# EAGLE board vybijec_panel (EAGLE 7.2.0)
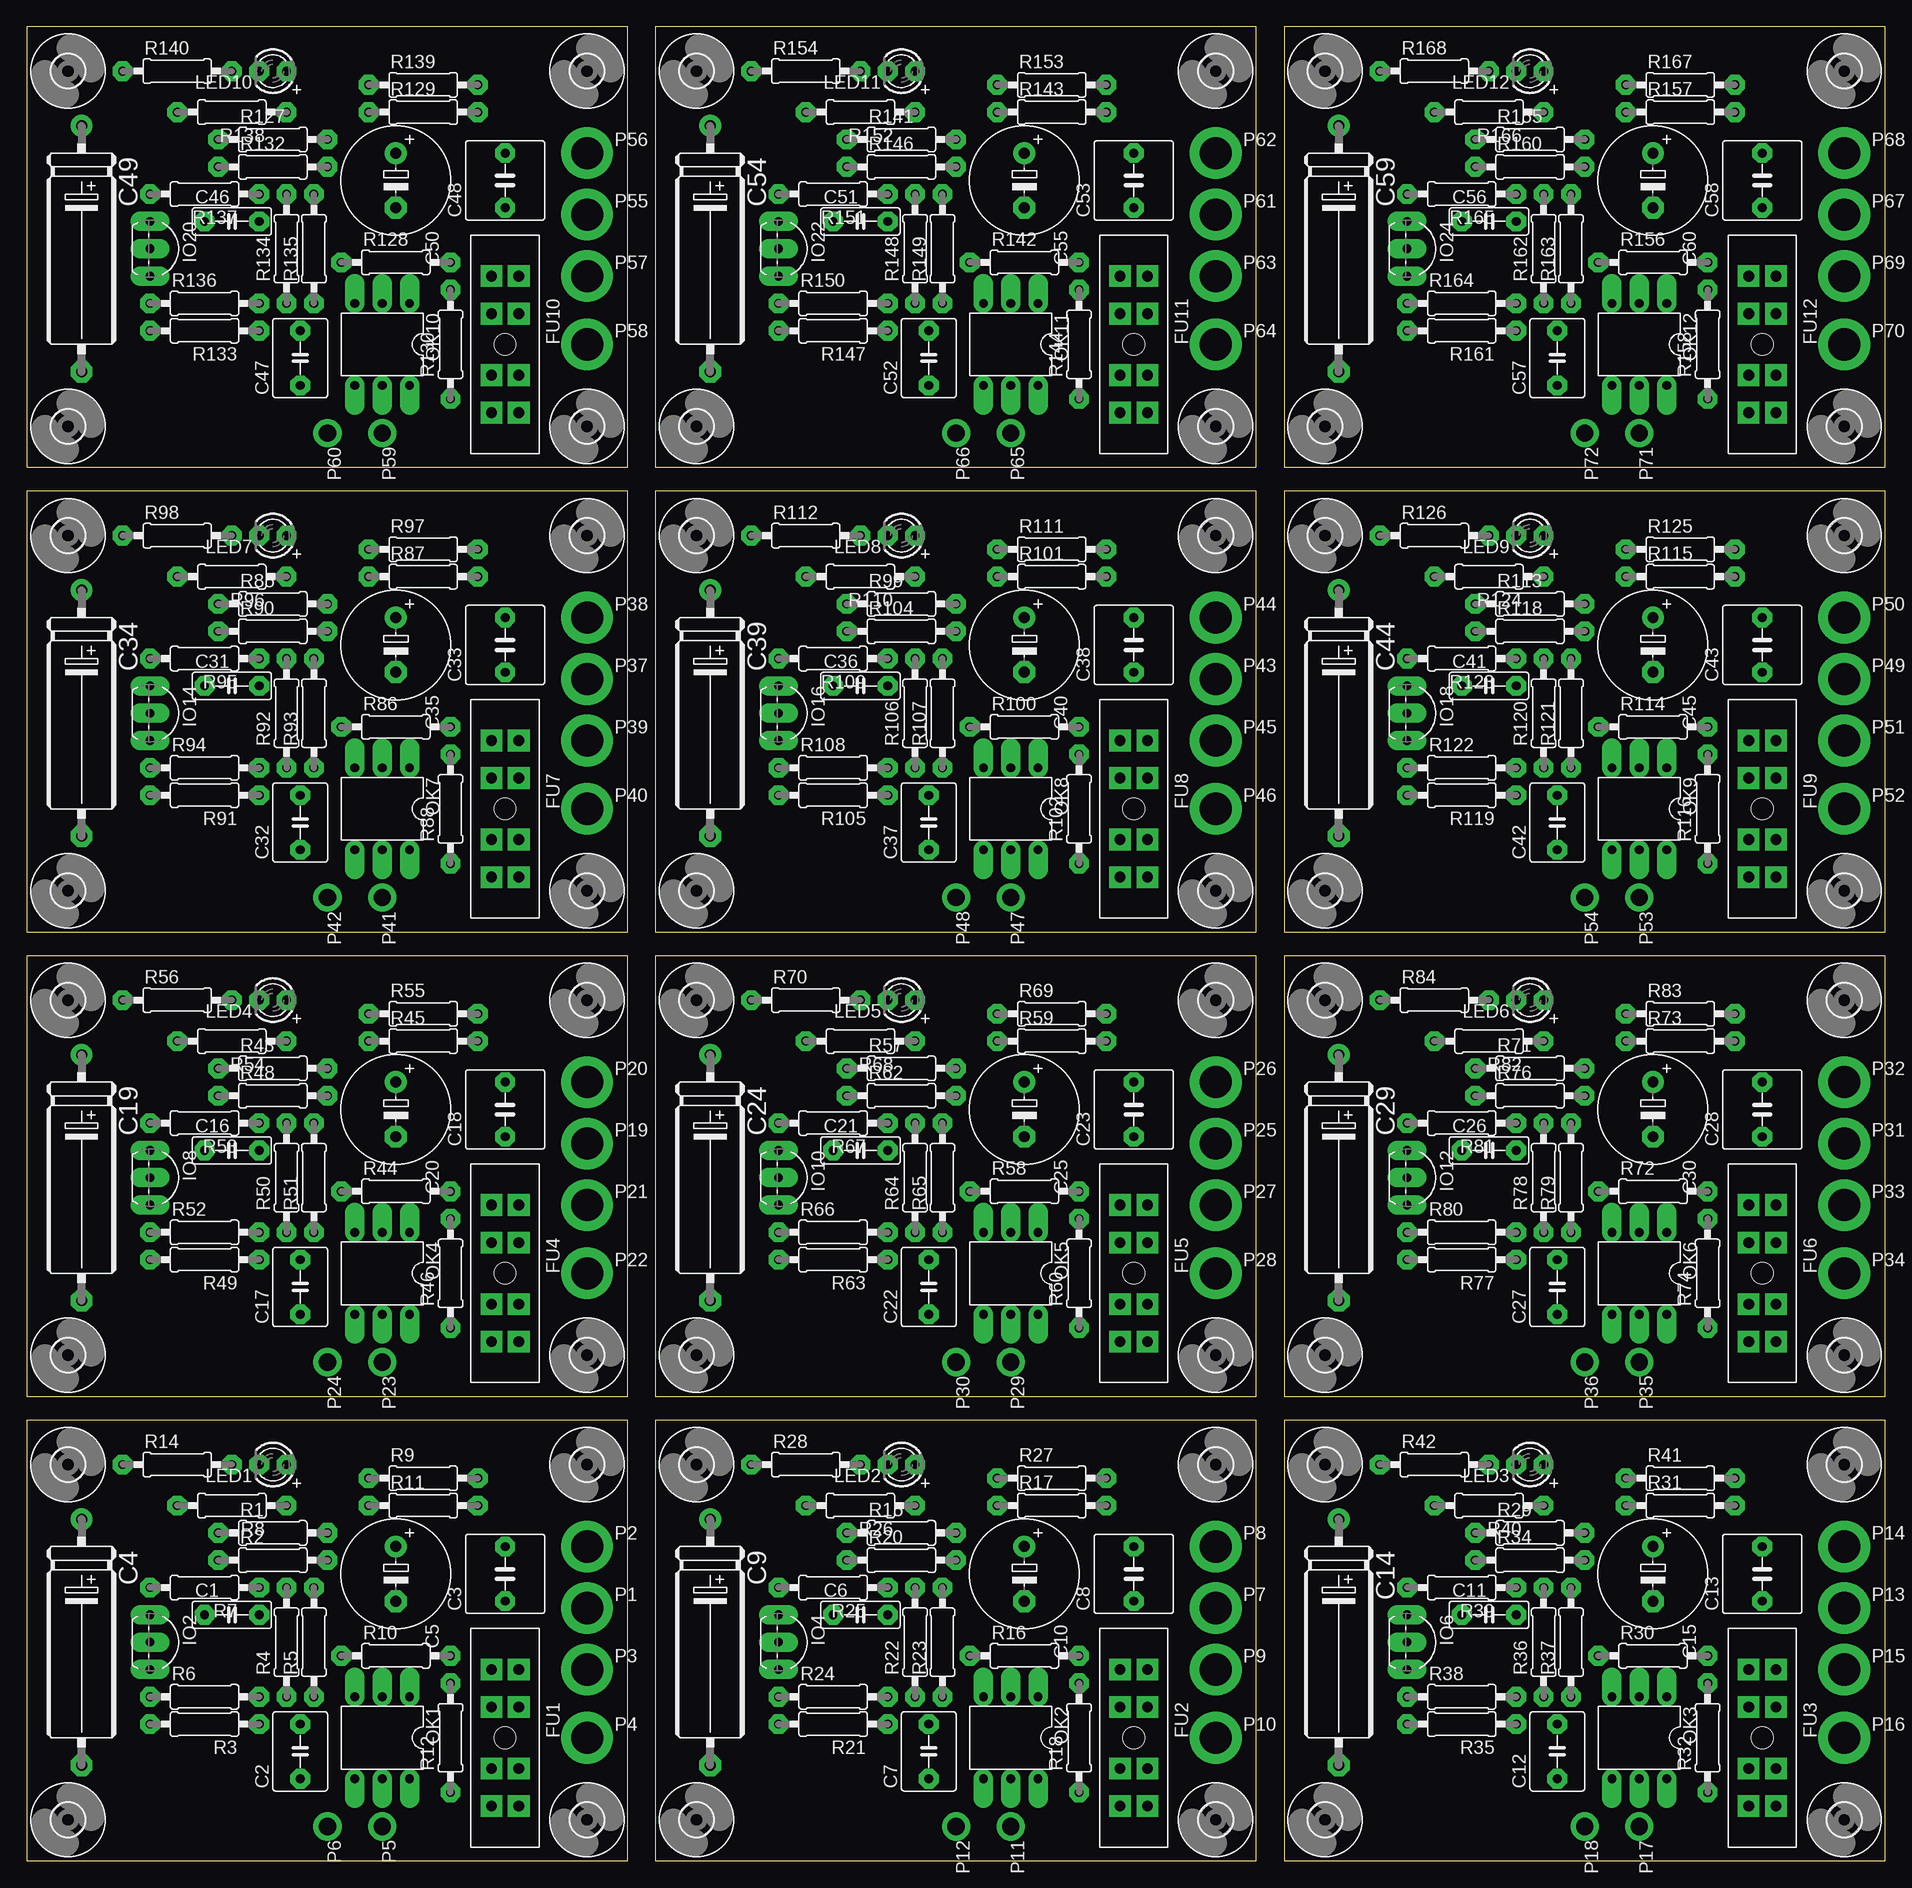
[diagram p0: board, top side]
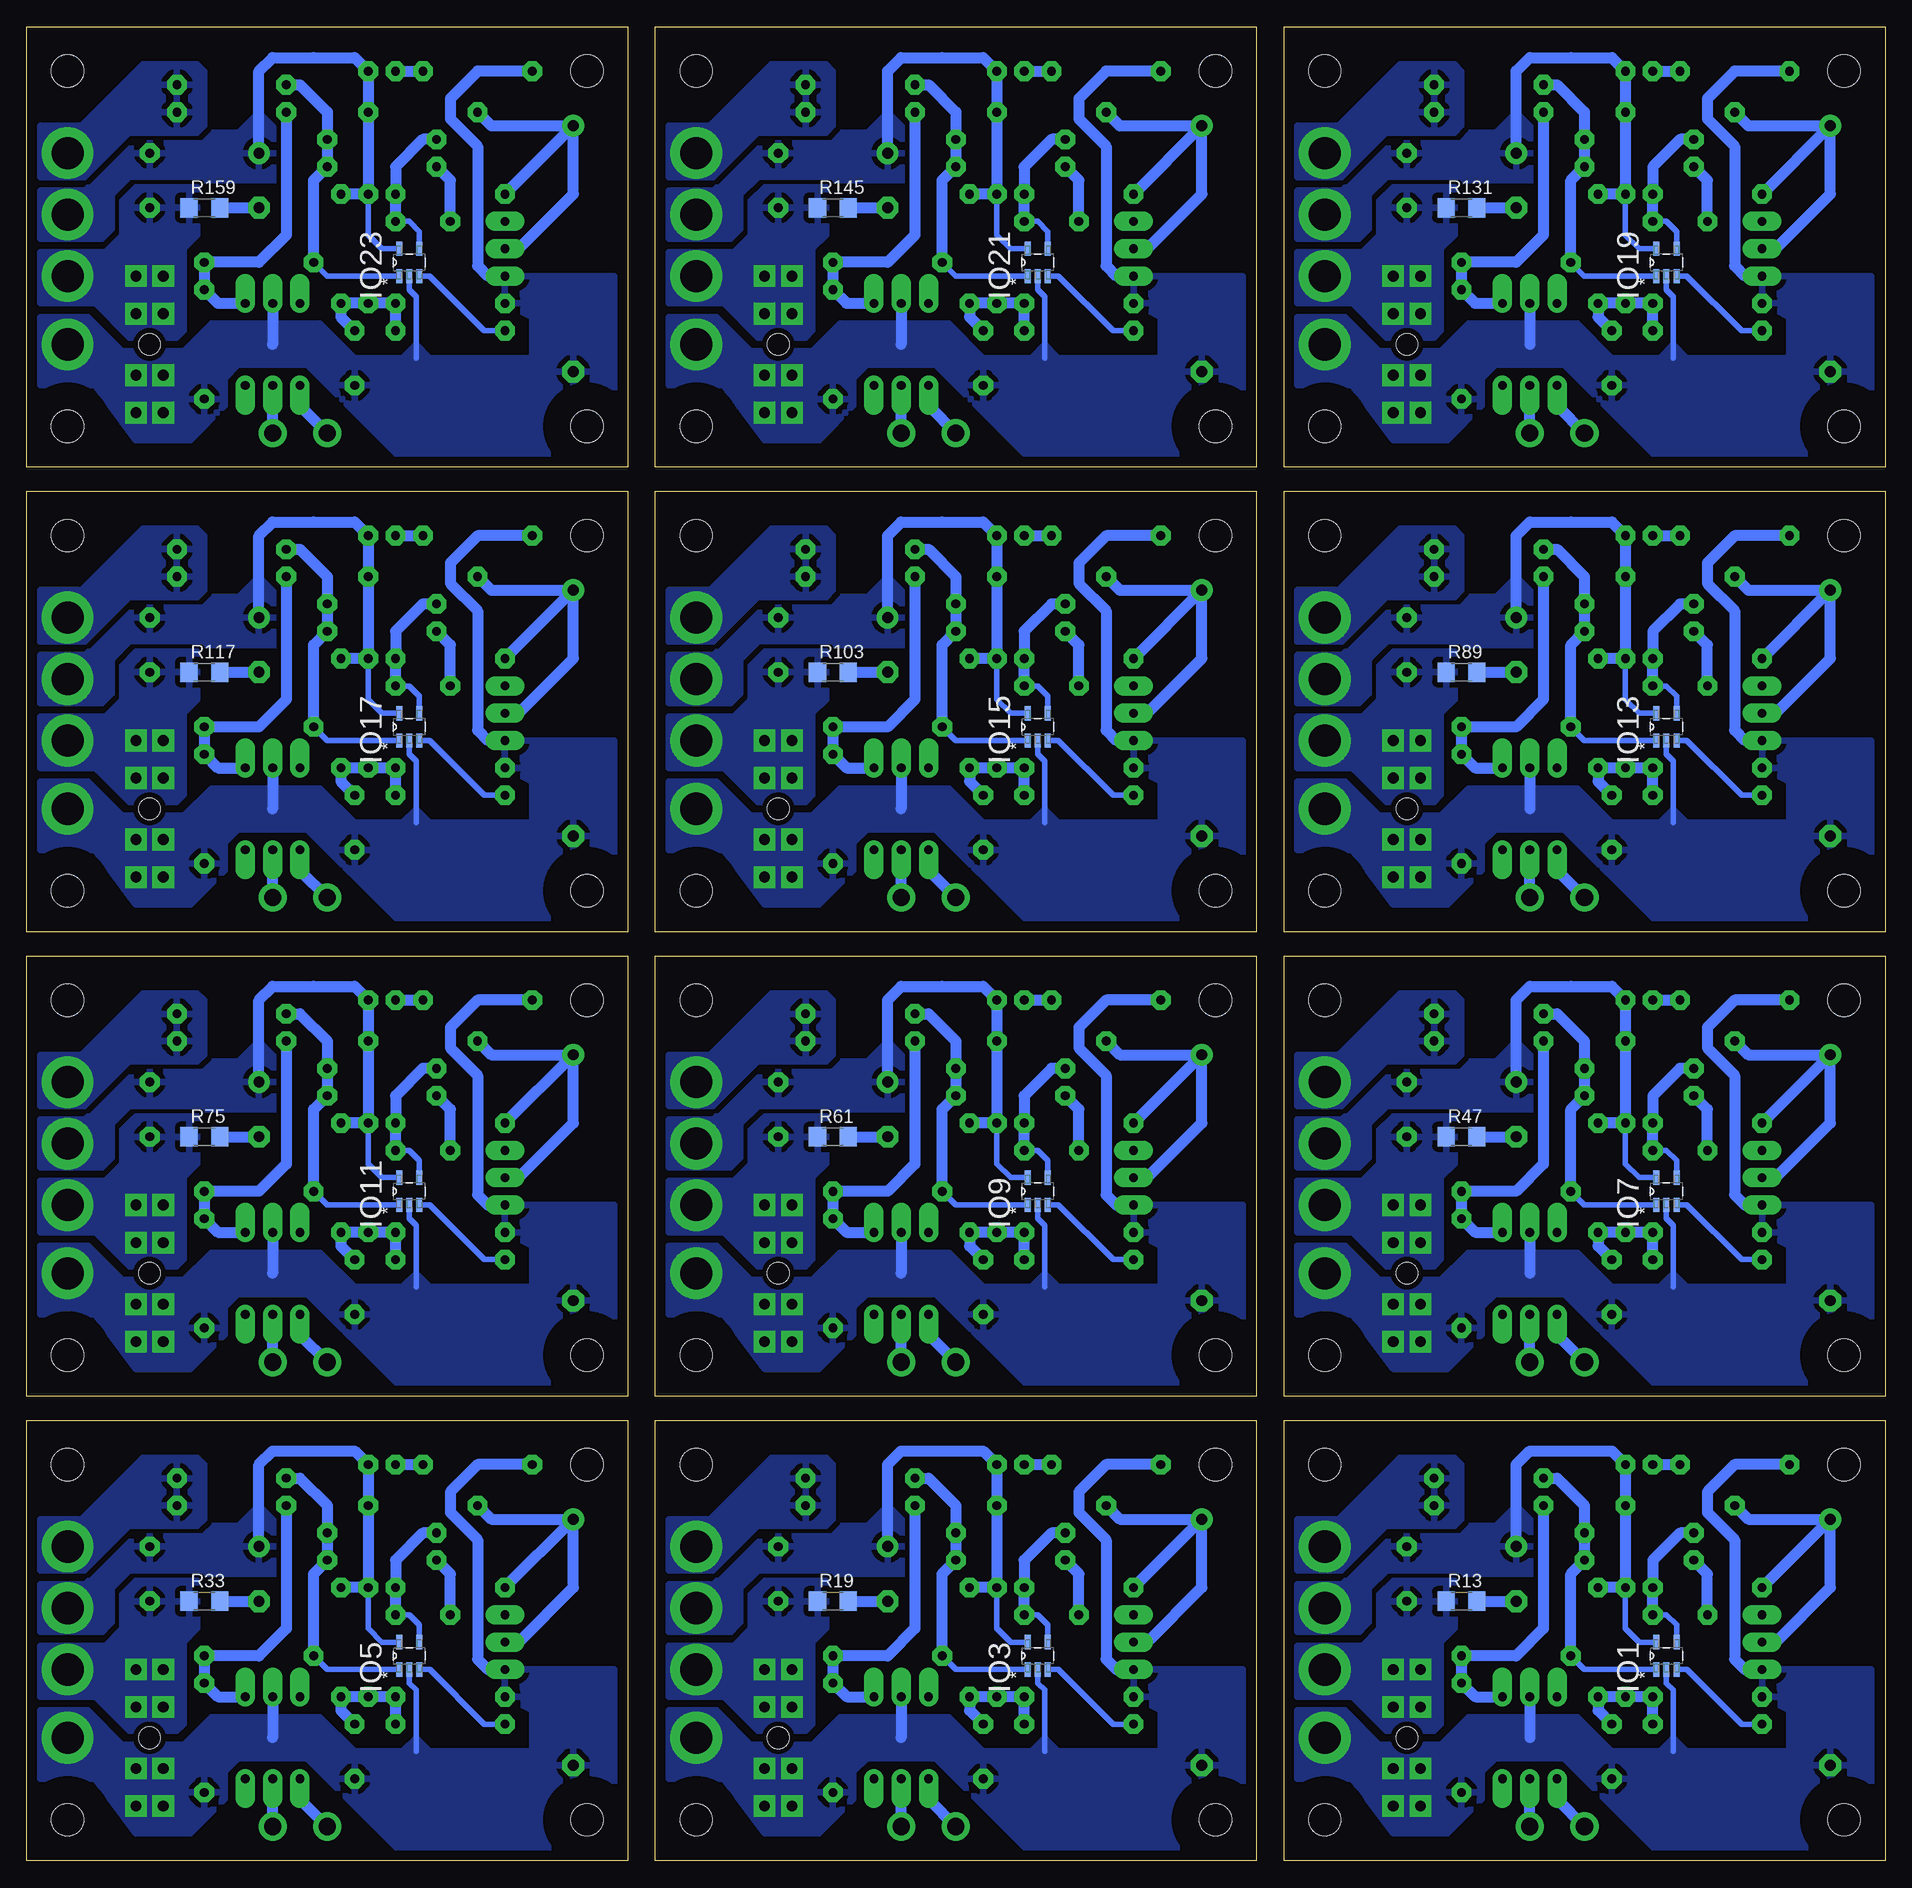
[diagram p1: board, bottom side, seen from below]

Size 172.7 x 170.49 mm. Coordinates in mm from the lower left corner, seen from the top.
Outline: 0,0 55.86,0 55.86,40.95 0,40.95 0,0
Outline: 58.42,0 114.28,0 114.28,40.95 58.42,40.95 58.42,0
Outline: 116.84,0 172.7,0 172.7,40.95 116.84,40.95 116.84,0
Outline: 0,43.18 55.86,43.18 55.86,84.12 0,84.12 0,43.18
Outline: 58.42,43.18 114.28,43.18 114.28,84.12 58.42,84.12 58.42,43.18
Outline: 116.84,43.18 172.7,43.18 172.7,84.12 116.84,84.12 116.84,43.18
Outline: 0,86.36 55.86,86.36 55.86,127.31 0,127.31 0,86.36
Outline: 58.42,86.36 114.28,86.36 114.28,127.31 58.42,127.31 58.42,86.36
Outline: 116.84,86.36 172.7,86.36 172.7,127.31 116.84,127.31 116.84,86.36
Outline: 0,129.54 55.86,129.54 55.86,170.49 0,170.49 0,129.54
Outline: 58.42,129.54 114.28,129.54 114.28,170.49 58.42,170.49 58.42,129.54
Outline: 116.84,129.54 172.7,129.54 172.7,170.49 116.84,170.49 116.84,129.54
Copper layers (1*16): Top 0.035mm / dielectric 1.5mm / Bottom 0.035mm
Design rules "designRules *": minimum track width 10mil, minimum drill 24mil, track to track 16mil, track to pad 10mil, pad to pad 8mil, via to via 8mil, smd to smd 8mil, copper to edge 20mil, drill to drill 8mil, minimum pad ring 20mil, minimum via ring 8mil, stop-mask expansion 4mil, vias tented up to drill 0mil, thermal gap 20mil

## Footprints (pad centres in the part's own frame; a part is rotated, then mirrored left to right if it is on the bottom)
C050-025X075 = drill 0.813 octagon: 1 -2.54,0; 2 2.54,0
C050-050X075 = drill 0.813 octagon: 1 -2.54,0; 2 2.54,0
C050-075X075 = drill 0.813 octagon: 1 -2.54,0; 2 2.54,0
E22-6 = drill 1.016: + -11.43,0 | drill 1.016 octagon: - 11.43,0
E5-10,5 = drill 1.016: + -2.54,0 | drill 1.016 octagon: - 2.54,0
POJ20X6 = drill 1 square: 1-1 1.27,6.35; 1-2 -1.27,6.35; 1-3 1.27,2.857; 1-4 -1.27,2.857; 2-1 1.27,-2.857; 2-2 -1.27,-2.857; 2-3 1.27,-6.35; 2-4 -1.27,-6.35 | hole 2: 0,0
SOT95P275X110-5N = smd 1.321 x 0.559: 1 -1.27,0.94; 2 -1.27,0; 3 -1.27,-0.94; 4 1.27,-0.94; 5 1.27,0.94
TO92- = drill 0.813 long: 1 2.54,0; 2 0,0; 3 -2.54,0
LED3MM = drill 0.813 pad 1.676 octagon: A -1.27,0; K 1.27,0
DIL06 = drill 0.813 offset: 1 -2.54,-3.81; 2 0,-3.81; 3 2.54,-3.81; 4 2.54,3.81; 5 0,3.81; 6 -2.54,3.81
PAD3MM = drill 3 pad 4: 1 0,0
PAD1.6MM = drill 1.6: P$1 0,0
0207/10 = drill 0.813 octagon: 1 -5.08,0; 2 5.08,0
R1206 = smd 1.6 x 1.803: 1 -1.422,0; 2 1.422,0
3,0 = hole 3: 0,0

## Placement (x,y rotation side)
C1  100k  [C050-025X075]  19.05,22.86 0 top
C2  2M2  [C050-050X075]  25.4,10.16 90 top
C3  15M  [C050-075X075]  44.45,26.67 90 top
C4  20M  [E22-6]  5.08,20.32 270 top
C5  2G2  [E5-10,5]  34.29,26.67 270 top
C6  100k  [C050-025X075]  77.47,22.86 0 top
C7  2M2  [C050-050X075]  83.82,10.16 90 top
C8  15M  [C050-075X075]  102.87,26.67 90 top
C9  20M  [E22-6]  63.5,20.32 270 top
C10  2G2  [E5-10,5]  92.71,26.67 270 top
C11  100k  [C050-025X075]  135.89,22.86 0 top
C12  2M2  [C050-050X075]  142.24,10.16 90 top
C13  15M  [C050-075X075]  161.29,26.67 90 top
C14  20M  [E22-6]  121.92,20.32 270 top
C15  2G2  [E5-10,5]  151.13,26.67 270 top
C16  100k  [C050-025X075]  19.05,66.04 0 top
C17  2M2  [C050-050X075]  25.4,53.34 90 top
C18  15M  [C050-075X075]  44.45,69.85 90 top
C19  20M  [E22-6]  5.08,63.5 270 top
C20  2G2  [E5-10,5]  34.29,69.85 270 top
C21  100k  [C050-025X075]  77.47,66.04 0 top
C22  2M2  [C050-050X075]  83.82,53.34 90 top
C23  15M  [C050-075X075]  102.87,69.85 90 top
C24  20M  [E22-6]  63.5,63.5 270 top
C25  2G2  [E5-10,5]  92.71,69.85 270 top
C26  100k  [C050-025X075]  135.89,66.04 0 top
C27  2M2  [C050-050X075]  142.24,53.34 90 top
C28  15M  [C050-075X075]  161.29,69.85 90 top
C29  20M  [E22-6]  121.92,63.5 270 top
C30  2G2  [E5-10,5]  151.13,69.85 270 top
C31  100k  [C050-025X075]  19.05,109.22 0 top
C32  2M2  [C050-050X075]  25.4,96.52 90 top
C33  15M  [C050-075X075]  44.45,113.03 90 top
C34  20M  [E22-6]  5.08,106.68 270 top
C35  2G2  [E5-10,5]  34.29,113.03 270 top
C36  100k  [C050-025X075]  77.47,109.22 0 top
C37  2M2  [C050-050X075]  83.82,96.52 90 top
C38  15M  [C050-075X075]  102.87,113.03 90 top
C39  20M  [E22-6]  63.5,106.68 270 top
C40  2G2  [E5-10,5]  92.71,113.03 270 top
C41  100k  [C050-025X075]  135.89,109.22 0 top
C42  2M2  [C050-050X075]  142.24,96.52 90 top
C43  15M  [C050-075X075]  161.29,113.03 90 top
C44  20M  [E22-6]  121.92,106.68 270 top
C45  2G2  [E5-10,5]  151.13,113.03 270 top
C46  100k  [C050-025X075]  19.05,152.4 0 top
C47  2M2  [C050-050X075]  25.4,139.7 90 top
C48  15M  [C050-075X075]  44.45,156.21 90 top
C49  20M  [E22-6]  5.08,149.86 270 top
C50  2G2  [E5-10,5]  34.29,156.21 270 top
C51  100k  [C050-025X075]  77.47,152.4 0 top
C52  2M2  [C050-050X075]  83.82,139.7 90 top
C53  15M  [C050-075X075]  102.87,156.21 90 top
C54  20M  [E22-6]  63.5,149.86 270 top
C55  2G2  [E5-10,5]  92.71,156.21 270 top
C56  100k  [C050-025X075]  135.89,152.4 0 top
C57  2M2  [C050-050X075]  142.24,139.7 90 top
C58  15M  [C050-075X075]  161.29,156.21 90 top
C59  20M  [E22-6]  121.92,149.86 270 top
C60  2G2  [E5-10,5]  151.13,156.21 270 top
FU1  20A  [POJ20X6]  44.45,11.43 0 top
FU2  20A  [POJ20X6]  102.87,11.43 0 top
FU3  20A  [POJ20X6]  161.29,11.43 0 top
FU4  20A  [POJ20X6]  44.45,54.61 0 top
FU5  20A  [POJ20X6]  102.87,54.61 0 top
FU6  20A  [POJ20X6]  161.29,54.61 0 top
FU7  20A  [POJ20X6]  44.45,97.79 0 top
FU8  20A  [POJ20X6]  102.87,97.79 0 top
FU9  20A  [POJ20X6]  161.29,97.79 0 top
FU10  20A  [POJ20X6]  44.45,140.97 0 top
FU11  20A  [POJ20X6]  102.87,140.97 0 top
FU12  20A  [POJ20X6]  161.29,140.97 0 top
IO1  NCS2001SN2T1G  [SOT95P275X110-5N]  20.32,19.05 90 bottom
IO2  LM285Z-2V5  [TO92-]  11.43,20.32 270 top
IO3  NCS2001SN2T1G  [SOT95P275X110-5N]  78.74,19.05 90 bottom
IO4  LM285Z-2V5  [TO92-]  69.85,20.32 270 top
IO5  NCS2001SN2T1G  [SOT95P275X110-5N]  137.16,19.05 90 bottom
IO6  LM285Z-2V5  [TO92-]  128.27,20.32 270 top
IO7  NCS2001SN2T1G  [SOT95P275X110-5N]  20.32,62.23 90 bottom
IO8  LM285Z-2V5  [TO92-]  11.43,63.5 270 top
IO9  NCS2001SN2T1G  [SOT95P275X110-5N]  78.74,62.23 90 bottom
IO10  LM285Z-2V5  [TO92-]  69.85,63.5 270 top
IO11  NCS2001SN2T1G  [SOT95P275X110-5N]  137.16,62.23 90 bottom
IO12  LM285Z-2V5  [TO92-]  128.27,63.5 270 top
IO13  NCS2001SN2T1G  [SOT95P275X110-5N]  20.32,105.41 90 bottom
IO14  LM285Z-2V5  [TO92-]  11.43,106.68 270 top
IO15  NCS2001SN2T1G  [SOT95P275X110-5N]  78.74,105.41 90 bottom
IO16  LM285Z-2V5  [TO92-]  69.85,106.68 270 top
IO17  NCS2001SN2T1G  [SOT95P275X110-5N]  137.16,105.41 90 bottom
IO18  LM285Z-2V5  [TO92-]  128.27,106.68 270 top
IO19  NCS2001SN2T1G  [SOT95P275X110-5N]  20.32,148.59 90 bottom
IO20  LM285Z-2V5  [TO92-]  11.43,149.86 270 top
IO21  NCS2001SN2T1G  [SOT95P275X110-5N]  78.74,148.59 90 bottom
IO22  LM285Z-2V5  [TO92-]  69.85,149.86 270 top
IO23  NCS2001SN2T1G  [SOT95P275X110-5N]  137.16,148.59 90 bottom
IO24  LM285Z-2V5  [TO92-]  128.27,149.86 270 top
LED1  [LED3MM]  22.86,36.83 180 top
LED2  [LED3MM]  81.28,36.83 180 top
LED3  [LED3MM]  139.7,36.83 180 top
LED4  [LED3MM]  22.86,80.01 180 top
LED5  [LED3MM]  81.28,80.01 180 top
LED6  [LED3MM]  139.7,80.01 180 top
LED7  [LED3MM]  22.86,123.19 180 top
LED8  [LED3MM]  81.28,123.19 180 top
LED9  [LED3MM]  139.7,123.19 180 top
LED10  [LED3MM]  22.86,166.37 180 top
LED11  [LED3MM]  81.28,166.37 180 top
LED12  [LED3MM]  139.7,166.37 180 top
OK1  4N35  [DIL06]  33.02,11.43 180 top
OK2  4N35  [DIL06]  91.44,11.43 180 top
OK3  4N35  [DIL06]  149.86,11.43 180 top
OK4  4N35  [DIL06]  33.02,54.61 180 top
OK5  4N35  [DIL06]  91.44,54.61 180 top
OK6  4N35  [DIL06]  149.86,54.61 180 top
OK7  4N35  [DIL06]  33.02,97.79 180 top
OK8  4N35  [DIL06]  91.44,97.79 180 top
OK9  4N35  [DIL06]  149.86,97.79 180 top
OK10  4N35  [DIL06]  33.02,140.97 180 top
OK11  4N35  [DIL06]  91.44,140.97 180 top
OK12  4N35  [DIL06]  149.86,140.97 180 top
P1  COLLECTOR  [PAD3MM]  52.07,23.5 0 top
P2  BASE  [PAD3MM]  52.07,29.21 0 top
P3  EMITTER  [PAD3MM]  52.07,17.78 0 top
P4  GROUND  [PAD3MM]  52.07,11.43 0 top
P5  COL  [PAD1.6MM]  33.02,3.17 270 top
P6  EMIT  [PAD1.6MM]  27.94,3.17 270 top
P7  COLLECTOR  [PAD3MM]  110.49,23.5 0 top
P8  BASE  [PAD3MM]  110.49,29.21 0 top
P9  EMITTER  [PAD3MM]  110.49,17.78 0 top
P10  GROUND  [PAD3MM]  110.49,11.43 0 top
P11  COL  [PAD1.6MM]  91.44,3.17 270 top
P12  EMIT  [PAD1.6MM]  86.36,3.17 270 top
P13  COLLECTOR  [PAD3MM]  168.91,23.5 0 top
P14  BASE  [PAD3MM]  168.91,29.21 0 top
P15  EMITTER  [PAD3MM]  168.91,17.78 0 top
P16  GROUND  [PAD3MM]  168.91,11.43 0 top
P17  COL  [PAD1.6MM]  149.86,3.17 270 top
P18  EMIT  [PAD1.6MM]  144.78,3.17 270 top
P19  COLLECTOR  [PAD3MM]  52.07,66.67 0 top
P20  BASE  [PAD3MM]  52.07,72.39 0 top
P21  EMITTER  [PAD3MM]  52.07,60.96 0 top
P22  GROUND  [PAD3MM]  52.07,54.61 0 top
P23  COL  [PAD1.6MM]  33.02,46.35 270 top
P24  EMIT  [PAD1.6MM]  27.94,46.35 270 top
P25  COLLECTOR  [PAD3MM]  110.49,66.67 0 top
P26  BASE  [PAD3MM]  110.49,72.39 0 top
P27  EMITTER  [PAD3MM]  110.49,60.96 0 top
P28  GROUND  [PAD3MM]  110.49,54.61 0 top
P29  COL  [PAD1.6MM]  91.44,46.35 270 top
P30  EMIT  [PAD1.6MM]  86.36,46.35 270 top
P31  COLLECTOR  [PAD3MM]  168.91,66.67 0 top
P32  BASE  [PAD3MM]  168.91,72.39 0 top
P33  EMITTER  [PAD3MM]  168.91,60.96 0 top
P34  GROUND  [PAD3MM]  168.91,54.61 0 top
P35  COL  [PAD1.6MM]  149.86,46.35 270 top
P36  EMIT  [PAD1.6MM]  144.78,46.35 270 top
P37  COLLECTOR  [PAD3MM]  52.07,109.86 0 top
P38  BASE  [PAD3MM]  52.07,115.57 0 top
P39  EMITTER  [PAD3MM]  52.07,104.14 0 top
P40  GROUND  [PAD3MM]  52.07,97.79 0 top
P41  COL  [PAD1.6MM]  33.02,89.53 270 top
P42  EMIT  [PAD1.6MM]  27.94,89.53 270 top
P43  COLLECTOR  [PAD3MM]  110.49,109.86 0 top
P44  BASE  [PAD3MM]  110.49,115.57 0 top
P45  EMITTER  [PAD3MM]  110.49,104.14 0 top
P46  GROUND  [PAD3MM]  110.49,97.79 0 top
P47  COL  [PAD1.6MM]  91.44,89.53 270 top
P48  EMIT  [PAD1.6MM]  86.36,89.53 270 top
P49  COLLECTOR  [PAD3MM]  168.91,109.86 0 top
P50  BASE  [PAD3MM]  168.91,115.57 0 top
P51  EMITTER  [PAD3MM]  168.91,104.14 0 top
P52  GROUND  [PAD3MM]  168.91,97.79 0 top
P53  COL  [PAD1.6MM]  149.86,89.53 270 top
P54  EMIT  [PAD1.6MM]  144.78,89.53 270 top
P55  COLLECTOR  [PAD3MM]  52.07,153.03 0 top
P56  BASE  [PAD3MM]  52.07,158.75 0 top
P57  EMITTER  [PAD3MM]  52.07,147.32 0 top
P58  GROUND  [PAD3MM]  52.07,140.97 0 top
P59  COL  [PAD1.6MM]  33.02,132.72 270 top
P60  EMIT  [PAD1.6MM]  27.94,132.72 270 top
P61  COLLECTOR  [PAD3MM]  110.49,153.03 0 top
P62  BASE  [PAD3MM]  110.49,158.75 0 top
P63  EMITTER  [PAD3MM]  110.49,147.32 0 top
P64  GROUND  [PAD3MM]  110.49,140.97 0 top
P65  COL  [PAD1.6MM]  91.44,132.72 270 top
P66  EMIT  [PAD1.6MM]  86.36,132.72 270 top
P67  COLLECTOR  [PAD3MM]  168.91,153.03 0 top
P68  BASE  [PAD3MM]  168.91,158.75 0 top
P69  EMITTER  [PAD3MM]  168.91,147.32 0 top
P70  GROUND  [PAD3MM]  168.91,140.97 0 top
P71  COL  [PAD1.6MM]  149.86,132.72 270 top
P72  EMIT  [PAD1.6MM]  144.78,132.72 270 top
R1  M33  [0207/10]  22.86,30.48 0 top
R2  15k  [0207/10]  22.86,27.94 0 top
R3  1k2  [0207/10]  16.51,12.7 180 top
R4  3M3  [0207/10]  24.13,20.32 90 top
R5  3k3  [0207/10]  26.67,20.32 90 top
R6  5k6  [0207/10]  16.51,15.24 0 top
R7  3k3  [0207/10]  16.51,25.4 180 top
R8  12k  [0207/10]  19.05,33.02 180 top
R9  120R  [0207/10]  36.83,35.56 0 top
R10  15k  [0207/10]  34.29,19.05 0 top
R11  2k2  [0207/10]  36.83,33.02 0 top
R12  5k6  [0207/10]  39.37,11.43 90 top
R13  1R0  [R1206]  39.37,24.13 0 bottom
R14  330R  [0207/10]  13.97,36.83 0 top
R15  M33  [0207/10]  81.28,30.48 0 top
R16  15k  [0207/10]  92.71,19.05 0 top
R17  2k2  [0207/10]  95.25,33.02 0 top
R18  5k6  [0207/10]  97.79,11.43 90 top
R19  1R0  [R1206]  97.79,24.13 0 bottom
R20  15k  [0207/10]  81.28,27.94 0 top
R21  1k2  [0207/10]  74.93,12.7 180 top
R22  3M3  [0207/10]  82.55,20.32 90 top
R23  3k3  [0207/10]  85.09,20.32 90 top
R24  5k6  [0207/10]  74.93,15.24 0 top
R25  3k3  [0207/10]  74.93,25.4 180 top
R26  12k  [0207/10]  77.47,33.02 180 top
R27  120R  [0207/10]  95.25,35.56 0 top
R28  330R  [0207/10]  72.39,36.83 0 top
R29  M33  [0207/10]  139.7,30.48 0 top
R30  15k  [0207/10]  151.13,19.05 0 top
R31  2k2  [0207/10]  153.67,33.02 0 top
R32  5k6  [0207/10]  156.21,11.43 90 top
R33  1R0  [R1206]  156.21,24.13 0 bottom
R34  15k  [0207/10]  139.7,27.94 0 top
R35  1k2  [0207/10]  133.35,12.7 180 top
R36  3M3  [0207/10]  140.97,20.32 90 top
R37  3k3  [0207/10]  143.51,20.32 90 top
R38  5k6  [0207/10]  133.35,15.24 0 top
R39  3k3  [0207/10]  133.35,25.4 180 top
R40  12k  [0207/10]  135.89,33.02 180 top
R41  120R  [0207/10]  153.67,35.56 0 top
R42  330R  [0207/10]  130.81,36.83 0 top
R43  M33  [0207/10]  22.86,73.66 0 top
R44  15k  [0207/10]  34.29,62.23 0 top
R45  2k2  [0207/10]  36.83,76.2 0 top
R46  5k6  [0207/10]  39.37,54.61 90 top
R47  1R0  [R1206]  39.37,67.31 0 bottom
R48  15k  [0207/10]  22.86,71.12 0 top
R49  1k2  [0207/10]  16.51,55.88 180 top
R50  3M3  [0207/10]  24.13,63.5 90 top
R51  3k3  [0207/10]  26.67,63.5 90 top
R52  5k6  [0207/10]  16.51,58.42 0 top
R53  3k3  [0207/10]  16.51,68.58 180 top
R54  12k  [0207/10]  19.05,76.2 180 top
R55  120R  [0207/10]  36.83,78.74 0 top
R56  330R  [0207/10]  13.97,80.01 0 top
R57  M33  [0207/10]  81.28,73.66 0 top
R58  15k  [0207/10]  92.71,62.23 0 top
R59  2k2  [0207/10]  95.25,76.2 0 top
R60  5k6  [0207/10]  97.79,54.61 90 top
R61  1R0  [R1206]  97.79,67.31 0 bottom
R62  15k  [0207/10]  81.28,71.12 0 top
R63  1k2  [0207/10]  74.93,55.88 180 top
R64  3M3  [0207/10]  82.55,63.5 90 top
R65  3k3  [0207/10]  85.09,63.5 90 top
R66  5k6  [0207/10]  74.93,58.42 0 top
R67  3k3  [0207/10]  74.93,68.58 180 top
R68  12k  [0207/10]  77.47,76.2 180 top
R69  120R  [0207/10]  95.25,78.74 0 top
R70  330R  [0207/10]  72.39,80.01 0 top
R71  M33  [0207/10]  139.7,73.66 0 top
R72  15k  [0207/10]  151.13,62.23 0 top
R73  2k2  [0207/10]  153.67,76.2 0 top
R74  5k6  [0207/10]  156.21,54.61 90 top
R75  1R0  [R1206]  156.21,67.31 0 bottom
R76  15k  [0207/10]  139.7,71.12 0 top
R77  1k2  [0207/10]  133.35,55.88 180 top
R78  3M3  [0207/10]  140.97,63.5 90 top
R79  3k3  [0207/10]  143.51,63.5 90 top
R80  5k6  [0207/10]  133.35,58.42 0 top
R81  3k3  [0207/10]  133.35,68.58 180 top
R82  12k  [0207/10]  135.89,76.2 180 top
R83  120R  [0207/10]  153.67,78.74 0 top
R84  330R  [0207/10]  130.81,80.01 0 top
R85  M33  [0207/10]  22.86,116.84 0 top
R86  15k  [0207/10]  34.29,105.41 0 top
R87  2k2  [0207/10]  36.83,119.38 0 top
R88  5k6  [0207/10]  39.37,97.79 90 top
R89  1R0  [R1206]  39.37,110.49 0 bottom
R90  15k  [0207/10]  22.86,114.3 0 top
R91  1k2  [0207/10]  16.51,99.06 180 top
R92  3M3  [0207/10]  24.13,106.68 90 top
R93  3k3  [0207/10]  26.67,106.68 90 top
R94  5k6  [0207/10]  16.51,101.6 0 top
R95  3k3  [0207/10]  16.51,111.76 180 top
R96  12k  [0207/10]  19.05,119.38 180 top
R97  120R  [0207/10]  36.83,121.92 0 top
R98  330R  [0207/10]  13.97,123.19 0 top
R99  M33  [0207/10]  81.28,116.84 0 top
R100  15k  [0207/10]  92.71,105.41 0 top
R101  2k2  [0207/10]  95.25,119.38 0 top
R102  5k6  [0207/10]  97.79,97.79 90 top
R103  1R0  [R1206]  97.79,110.49 0 bottom
R104  15k  [0207/10]  81.28,114.3 0 top
R105  1k2  [0207/10]  74.93,99.06 180 top
R106  3M3  [0207/10]  82.55,106.68 90 top
R107  3k3  [0207/10]  85.09,106.68 90 top
R108  5k6  [0207/10]  74.93,101.6 0 top
R109  3k3  [0207/10]  74.93,111.76 180 top
R110  12k  [0207/10]  77.47,119.38 180 top
R111  120R  [0207/10]  95.25,121.92 0 top
R112  330R  [0207/10]  72.39,123.19 0 top
R113  M33  [0207/10]  139.7,116.84 0 top
R114  15k  [0207/10]  151.13,105.41 0 top
R115  2k2  [0207/10]  153.67,119.38 0 top
R116  5k6  [0207/10]  156.21,97.79 90 top
R117  1R0  [R1206]  156.21,110.49 0 bottom
R118  15k  [0207/10]  139.7,114.3 0 top
R119  1k2  [0207/10]  133.35,99.06 180 top
R120  3M3  [0207/10]  140.97,106.68 90 top
R121  3k3  [0207/10]  143.51,106.68 90 top
R122  5k6  [0207/10]  133.35,101.6 0 top
R123  3k3  [0207/10]  133.35,111.76 180 top
R124  12k  [0207/10]  135.89,119.38 180 top
R125  120R  [0207/10]  153.67,121.92 0 top
R126  330R  [0207/10]  130.81,123.19 0 top
R127  M33  [0207/10]  22.86,160.02 0 top
R128  15k  [0207/10]  34.29,148.59 0 top
R129  2k2  [0207/10]  36.83,162.56 0 top
R130  5k6  [0207/10]  39.37,140.97 90 top
R131  1R0  [R1206]  39.37,153.67 0 bottom
R132  15k  [0207/10]  22.86,157.48 0 top
R133  1k2  [0207/10]  16.51,142.24 180 top
R134  3M3  [0207/10]  24.13,149.86 90 top
R135  3k3  [0207/10]  26.67,149.86 90 top
R136  5k6  [0207/10]  16.51,144.78 0 top
R137  3k3  [0207/10]  16.51,154.94 180 top
R138  12k  [0207/10]  19.05,162.56 180 top
R139  120R  [0207/10]  36.83,165.1 0 top
R140  330R  [0207/10]  13.97,166.37 0 top
R141  M33  [0207/10]  81.28,160.02 0 top
R142  15k  [0207/10]  92.71,148.59 0 top
R143  2k2  [0207/10]  95.25,162.56 0 top
R144  5k6  [0207/10]  97.79,140.97 90 top
R145  1R0  [R1206]  97.79,153.67 0 bottom
R146  15k  [0207/10]  81.28,157.48 0 top
R147  1k2  [0207/10]  74.93,142.24 180 top
R148  3M3  [0207/10]  82.55,149.86 90 top
R149  3k3  [0207/10]  85.09,149.86 90 top
R150  5k6  [0207/10]  74.93,144.78 0 top
R151  3k3  [0207/10]  74.93,154.94 180 top
R152  12k  [0207/10]  77.47,162.56 180 top
R153  120R  [0207/10]  95.25,165.1 0 top
R154  330R  [0207/10]  72.39,166.37 0 top
R155  M33  [0207/10]  139.7,160.02 0 top
R156  15k  [0207/10]  151.13,148.59 0 top
R157  2k2  [0207/10]  153.67,162.56 0 top
R158  5k6  [0207/10]  156.21,140.97 90 top
R159  1R0  [R1206]  156.21,153.67 0 bottom
R160  15k  [0207/10]  139.7,157.48 0 top
R161  1k2  [0207/10]  133.35,142.24 180 top
R162  3M3  [0207/10]  140.97,149.86 90 top
R163  3k3  [0207/10]  143.51,149.86 90 top
R164  5k6  [0207/10]  133.35,144.78 0 top
R165  3k3  [0207/10]  133.35,154.94 180 top
R166  12k  [0207/10]  135.89,162.56 180 top
R167  120R  [0207/10]  153.67,165.1 0 top
R168  330R  [0207/10]  130.81,166.37 0 top
U$1  [3,0]  3.81,3.81 0 top
U$2  [3,0]  3.81,36.83 0 top
U$3  [3,0]  52.07,3.81 0 top
U$4  [3,0]  52.07,36.83 0 top
U$5  [3,0]  62.23,3.81 0 top
U$6  [3,0]  62.23,36.83 0 top
U$7  [3,0]  110.49,3.81 0 top
U$8  [3,0]  110.49,36.83 0 top
U$9  [3,0]  120.65,3.81 0 top
U$10  [3,0]  120.65,36.83 0 top
U$11  [3,0]  168.91,3.81 0 top
U$12  [3,0]  168.91,36.83 0 top
U$13  [3,0]  3.81,46.99 0 top
U$14  [3,0]  3.81,80.01 0 top
U$15  [3,0]  52.07,46.99 0 top
U$16  [3,0]  52.07,80.01 0 top
U$17  [3,0]  62.23,46.99 0 top
U$18  [3,0]  62.23,80.01 0 top
U$19  [3,0]  110.49,46.99 0 top
U$20  [3,0]  110.49,80.01 0 top
U$21  [3,0]  120.65,46.99 0 top
U$22  [3,0]  120.65,80.01 0 top
U$23  [3,0]  168.91,46.99 0 top
U$24  [3,0]  168.91,80.01 0 top
U$25  [3,0]  3.81,90.17 0 top
U$26  [3,0]  3.81,123.19 0 top
U$27  [3,0]  52.07,90.17 0 top
U$28  [3,0]  52.07,123.19 0 top
U$29  [3,0]  62.23,90.17 0 top
U$30  [3,0]  62.23,123.19 0 top
U$31  [3,0]  110.49,90.17 0 top
U$32  [3,0]  110.49,123.19 0 top
U$33  [3,0]  120.65,90.17 0 top
U$34  [3,0]  120.65,123.19 0 top
U$35  [3,0]  168.91,90.17 0 top
U$36  [3,0]  168.91,123.19 0 top
U$37  [3,0]  3.81,133.35 0 top
U$38  [3,0]  3.81,166.37 0 top
U$39  [3,0]  52.07,133.35 0 top
U$40  [3,0]  52.07,166.37 0 top
U$41  [3,0]  62.23,133.35 0 top
U$42  [3,0]  62.23,166.37 0 top
U$43  [3,0]  110.49,133.35 0 top
U$44  [3,0]  110.49,166.37 0 top
U$45  [3,0]  120.65,133.35 0 top
U$46  [3,0]  120.65,166.37 0 top
U$47  [3,0]  168.91,133.35 0 top
U$48  [3,0]  168.91,166.37 0 top

## Library data of the parts
C1-C60 R1-R168 = rcl
FU1-FU12 = pojistka
IO1 IO3 IO5 IO7 IO9 IO11 IO13 IO15 IO17 IO19 IO21 IO23 = NCS2001
IO2 IO4 IO6 IO8 IO10 IO12 IO14 IO16 IO18 IO20 IO22 IO24 = LM285
LED1-LED12 = adafruit
OK1-OK12 = optocoupler; MF: FAIRCHILD SEMICONDUCTOR; MPN: 4N35; OC_FARNELL: 1328375; OC_NEWARK: 72K9946
P1-P4 P7-P10 P13-P16 P19-P22 P25-P28 P31-P34 P37-P40 P43-P46 P49-P52 P55-P58 P61-P64 P67-P70 = PADs; DIAMETER: 3mm
P5 P6 P11 P12 P17 P18 P23 P24 P29 P30 P35 P36 P41 P42 P47 P48 P53 P54 P59 P60 P65 P66 P71 P72 = PADs
U$1-U$48 = holes

## Nets
GND: C2.1 C4.- FU1.2-1 FU1.2-2 FU1.2-3 FU1.2-4 IO1.2 IO2.1 OK1.2 P4.1 R6.1 R12.1 R14.1
GND1: C7.1 C9.- FU2.2-1 FU2.2-2 FU2.2-3 FU2.2-4 IO3.2 IO4.1 OK2.2 P10.1 R18.1 R24.1 R28.1
GND2: C12.1 C14.- FU3.2-1 FU3.2-2 FU3.2-3 FU3.2-4 IO5.2 IO6.1 OK3.2 P16.1 R32.1 R38.1 R42.1
GND3: C17.1 C19.- FU4.2-1 FU4.2-2 FU4.2-3 FU4.2-4 IO7.2 IO8.1 OK4.2 P22.1 R46.1 R52.1 R56.1
GND4: C22.1 C24.- FU5.2-1 FU5.2-2 FU5.2-3 FU5.2-4 IO9.2 IO10.1 OK5.2 P28.1 R60.1 R66.1 R70.1
GND5: C27.1 C29.- FU6.2-1 FU6.2-2 FU6.2-3 FU6.2-4 IO11.2 IO12.1 OK6.2 P34.1 R74.1 R80.1 R84.1
GND6: C32.1 C34.- FU7.2-1 FU7.2-2 FU7.2-3 FU7.2-4 IO13.2 IO14.1 OK7.2 P40.1 R88.1 R94.1 R98.1
GND7: C37.1 C39.- FU8.2-1 FU8.2-2 FU8.2-3 FU8.2-4 IO15.2 IO16.1 OK8.2 P46.1 R102.1 R108.1 R112.1
GND8: C42.1 C44.- FU9.2-1 FU9.2-2 FU9.2-3 FU9.2-4 IO17.2 IO18.1 OK9.2 P52.1 R116.1 R122.1 R126.1
GND9: C47.1 C49.- FU10.2-1 FU10.2-2 FU10.2-3 FU10.2-4 IO19.2 IO20.1 OK10.2 P58.1 R130.1 R136.1 R140.1
GND10: C52.1 C54.- FU11.2-1 FU11.2-2 FU11.2-3 FU11.2-4 IO21.2 IO22.1 OK11.2 P64.1 R144.1 R150.1 R154.1
GND11: C57.1 C59.- FU12.2-1 FU12.2-2 FU12.2-3 FU12.2-4 IO23.2 IO24.1 OK12.2 P70.1 R158.1 R164.1 R168.1
N$1: C1.1 R2.1
N$2: IO1.1 R1.2 R2.2 R9.1 R10.1
N$3: C4.+ IO2.2 R7.2 R8.2
N$4: C1.2 IO1.4 R1.1 R7.1
N$5: IO1.3 R3.2
N$6: C2.2 R3.1 R4.1 R5.1 R6.2
N$7: C3.1 FU1.1-1 FU1.1-2 FU1.1-3 FU1.1-4 P3.1 R13.1
N$8: OK1.1 R10.2 R11.1 R12.2
N$9: P2.1 R9.2 R11.2
N$10: OK1.5 P5.P$1
N$11: OK1.4 P6.P$1
N$12: LED1.K R14.2
N$13: IO3.1 R15.2 R16.1 R20.2 R27.1
N$14: C5.- R13.2
N$15: C6.2 IO3.4 R15.1 R25.1
N$16: IO3.3 R21.2
N$17: C7.2 R21.1 R22.1 R23.1 R24.2
N$18: C9.+ IO4.2 R25.2 R26.2
N$19: OK2.1 R16.2 R17.1 R18.2
N$20: P8.1 R17.2 R27.2
N$21: OK2.5 P11.P$1
N$22: OK2.4 P12.P$1
N$23: C10.- R19.2
N$24: C8.1 FU2.1-1 FU2.1-2 FU2.1-3 FU2.1-4 P9.1 R19.1
N$25: C6.1 R20.1
N$26: LED2.K R28.2
N$27: IO5.1 R29.2 R30.1 R34.2 R41.1
N$28: C11.2 IO5.4 R29.1 R39.1
N$29: IO5.3 R35.2
N$30: C12.2 R35.1 R36.1 R37.1 R38.2
N$31: C14.+ IO6.2 R39.2 R40.2
N$32: OK3.1 R30.2 R31.1 R32.2
N$33: P14.1 R31.2 R41.2
N$34: OK3.5 P17.P$1
N$35: OK3.4 P18.P$1
N$36: C15.- R33.2
N$37: C13.1 FU3.1-1 FU3.1-2 FU3.1-3 FU3.1-4 P15.1 R33.1
N$38: C11.1 R34.1
N$39: LED3.K R42.2
N$40: IO7.1 R43.2 R44.1 R48.2 R55.1
N$41: C16.2 IO7.4 R43.1 R53.1
N$42: IO7.3 R49.2
N$43: C17.2 R49.1 R50.1 R51.1 R52.2
N$44: C19.+ IO8.2 R53.2 R54.2
N$45: OK4.1 R44.2 R45.1 R46.2
N$46: P20.1 R45.2 R55.2
N$47: OK4.5 P23.P$1
N$48: OK4.4 P24.P$1
N$49: C20.- R47.2
N$50: C18.1 FU4.1-1 FU4.1-2 FU4.1-3 FU4.1-4 P21.1 R47.1
N$51: C16.1 R48.1
N$52: LED4.K R56.2
N$53: IO9.1 R57.2 R58.1 R62.2 R69.1
N$54: C21.2 IO9.4 R57.1 R67.1
N$55: IO9.3 R63.2
N$56: C22.2 R63.1 R64.1 R65.1 R66.2
N$57: C24.+ IO10.2 R67.2 R68.2
N$58: OK5.1 R58.2 R59.1 R60.2
N$59: P26.1 R59.2 R69.2
N$60: OK5.5 P29.P$1
N$61: OK5.4 P30.P$1
N$62: C25.- R61.2
N$63: C23.1 FU5.1-1 FU5.1-2 FU5.1-3 FU5.1-4 P27.1 R61.1
N$64: C21.1 R62.1
N$65: LED5.K R70.2
N$66: IO11.1 R71.2 R72.1 R76.2 R83.1
N$67: C26.2 IO11.4 R71.1 R81.1
N$68: IO11.3 R77.2
N$69: C27.2 R77.1 R78.1 R79.1 R80.2
N$70: C29.+ IO12.2 R81.2 R82.2
N$71: OK6.1 R72.2 R73.1 R74.2
N$72: P32.1 R73.2 R83.2
N$73: OK6.5 P35.P$1
N$74: OK6.4 P36.P$1
N$75: C30.- R75.2
N$76: C28.1 FU6.1-1 FU6.1-2 FU6.1-3 FU6.1-4 P33.1 R75.1
N$77: C26.1 R76.1
N$78: LED6.K R84.2
N$79: IO13.1 R85.2 R86.1 R90.2 R97.1
N$80: C31.2 IO13.4 R85.1 R95.1
N$81: IO13.3 R91.2
N$82: C32.2 R91.1 R92.1 R93.1 R94.2
N$83: C34.+ IO14.2 R95.2 R96.2
N$84: OK7.1 R86.2 R87.1 R88.2
N$85: P38.1 R87.2 R97.2
N$86: OK7.5 P41.P$1
N$87: OK7.4 P42.P$1
N$88: C35.- R89.2
N$89: C33.1 FU7.1-1 FU7.1-2 FU7.1-3 FU7.1-4 P39.1 R89.1
N$90: C31.1 R90.1
N$91: LED7.K R98.2
N$92: IO15.1 R99.2 R100.1 R104.2 R111.1
N$93: C36.2 IO15.4 R99.1 R109.1
N$94: IO15.3 R105.2
N$95: C37.2 R105.1 R106.1 R107.1 R108.2
N$96: C39.+ IO16.2 R109.2 R110.2
N$97: OK8.1 R100.2 R101.1 R102.2
N$98: P44.1 R101.2 R111.2
N$99: OK8.5 P47.P$1
N$100: OK8.4 P48.P$1
N$101: C40.- R103.2
N$102: C38.1 FU8.1-1 FU8.1-2 FU8.1-3 FU8.1-4 P45.1 R103.1
N$103: C36.1 R104.1
N$104: LED8.K R112.2
N$105: IO17.1 R113.2 R114.1 R118.2 R125.1
N$106: C41.2 IO17.4 R113.1 R123.1
N$107: IO17.3 R119.2
N$108: C42.2 R119.1 R120.1 R121.1 R122.2
N$109: C44.+ IO18.2 R123.2 R124.2
N$110: OK9.1 R114.2 R115.1 R116.2
N$111: P50.1 R115.2 R125.2
N$112: OK9.5 P53.P$1
N$113: OK9.4 P54.P$1
N$114: C45.- R117.2
N$115: C43.1 FU9.1-1 FU9.1-2 FU9.1-3 FU9.1-4 P51.1 R117.1
N$116: C41.1 R118.1
N$117: LED9.K R126.2
N$118: IO19.1 R127.2 R128.1 R132.2 R139.1
N$119: C46.2 IO19.4 R127.1 R137.1
N$120: IO19.3 R133.2
N$121: C47.2 R133.1 R134.1 R135.1 R136.2
N$122: C49.+ IO20.2 R137.2 R138.2
N$123: OK10.1 R128.2 R129.1 R130.2
N$124: P56.1 R129.2 R139.2
N$125: OK10.5 P59.P$1
N$126: OK10.4 P60.P$1
N$127: C50.- R131.2
N$128: C48.1 FU10.1-1 FU10.1-2 FU10.1-3 FU10.1-4 P57.1 R131.1
N$129: C46.1 R132.1
N$130: LED10.K R140.2
N$131: IO21.1 R141.2 R142.1 R146.2 R153.1
N$132: C51.2 IO21.4 R141.1 R151.1
N$133: IO21.3 R147.2
N$134: C52.2 R147.1 R148.1 R149.1 R150.2
N$135: C54.+ IO22.2 R151.2 R152.2
N$136: OK11.1 R142.2 R143.1 R144.2
N$137: P62.1 R143.2 R153.2
N$138: OK11.5 P65.P$1
N$139: OK11.4 P66.P$1
N$140: C55.- R145.2
N$141: C53.1 FU11.1-1 FU11.1-2 FU11.1-3 FU11.1-4 P63.1 R145.1
N$142: C51.1 R146.1
N$143: LED11.K R154.2
N$144: IO23.1 R155.2 R156.1 R160.2 R167.1
N$145: C56.2 IO23.4 R155.1 R165.1
N$146: IO23.3 R161.2
N$147: C57.2 R161.1 R162.1 R163.1 R164.2
N$148: C59.+ IO24.2 R165.2 R166.2
N$149: OK12.1 R156.2 R157.1 R158.2
N$150: P68.1 R157.2 R167.2
N$151: OK12.5 P71.P$1
N$152: OK12.4 P72.P$1
N$153: C60.- R159.2
N$154: C58.1 FU12.1-1 FU12.1-2 FU12.1-3 FU12.1-4 P69.1 R159.1
N$155: C56.1 R160.1
N$156: LED12.K R168.2
VCC: C3.2 C5.+ IO1.5 LED1.A P1.1 R4.2 R5.2 R8.1
VCC1: C8.2 C10.+ IO3.5 LED2.A P7.1 R22.2 R23.2 R26.1
VCC2: C13.2 C15.+ IO5.5 LED3.A P13.1 R36.2 R37.2 R40.1
VCC3: C18.2 C20.+ IO7.5 LED4.A P19.1 R50.2 R51.2 R54.1
VCC4: C23.2 C25.+ IO9.5 LED5.A P25.1 R64.2 R65.2 R68.1
VCC5: C28.2 C30.+ IO11.5 LED6.A P31.1 R78.2 R79.2 R82.1
VCC6: C33.2 C35.+ IO13.5 LED7.A P37.1 R92.2 R93.2 R96.1
VCC7: C38.2 C40.+ IO15.5 LED8.A P43.1 R106.2 R107.2 R110.1
VCC8: C43.2 C45.+ IO17.5 LED9.A P49.1 R120.2 R121.2 R124.1
VCC9: C48.2 C50.+ IO19.5 LED10.A P55.1 R134.2 R135.2 R138.1
VCC10: C53.2 C55.+ IO21.5 LED11.A P61.1 R148.2 R149.2 R152.1
VCC11: C58.2 C60.+ IO23.5 LED12.A P67.1 R162.2 R163.2 R166.1

## Tracks (layer width: path | path; a pad name or v marks a point on that pad's centre or on a via)
GND
  Bottom 0.508: IO1.2 20.32,16.51 19.68,15.88 19.68,10.16
  Bottom 1.016: OK1.2 33.02,11.43 | R14.1 13.97,36.83 16.51,34.29 16.51,32.38 13.97,29.84 13.97,18.73 13.02,17.78 IO2.1
  pour Bottom: 50.16,13.97 54.61,13.97 54.61,7.62 49.53,7.62 45.72,2.54 40.64,2.54 37.47,5.71 37.47,8.26 36.2,9.53 29.84,9.53 21.59,1.27 1.27,1.27 1.27,17.78 11.43,17.78 11.43,15.24 8.89,13.97 8.89,10.16 18.41,10.16 19.68,11.43 20.95,10.16 25.4,10.16 28.57,13.34 38.73,13.34 41.27,10.79 46.99,10.79
GND1
  Bottom 0.508: IO3.2 78.74,16.51 78.11,15.88 78.11,10.16
  Bottom 1.016: OK2.2 91.44,11.43 | R28.1 72.39,36.83 74.93,34.29 74.93,32.38 72.39,29.84 72.39,18.73 71.44,17.78 IO4.1
  pour Bottom: 108.58,13.97 113.03,13.97 113.03,7.62 107.95,7.62 104.14,2.54 99.06,2.54 95.89,5.71 95.89,8.26 94.61,9.53 88.27,9.53 80.01,1.27 59.69,1.27 59.69,17.78 69.85,17.78 69.85,15.24 67.31,13.97 67.31,10.16 76.83,10.16 78.11,11.43 79.38,10.16 83.82,10.16 87,13.34 97.16,13.34 99.69,10.79 105.41,10.79
GND2
  Bottom 0.508: IO5.2 137.16,16.51 136.53,15.88 136.53,10.16
  Bottom 1.016: OK3.2 149.86,11.43 | R42.1 130.81,36.83 133.35,34.29 133.35,32.38 130.81,29.84 130.81,18.73 129.86,17.78 IO6.1
  pour Bottom: 167,13.97 171.45,13.97 171.45,7.62 166.37,7.62 162.56,2.54 157.48,2.54 154.31,5.71 154.31,8.26 153.03,9.53 146.69,9.53 138.43,1.27 118.11,1.27 118.11,17.78 128.27,17.78 128.27,15.24 125.73,13.97 125.73,10.16 135.25,10.16 136.53,11.43 137.79,10.16 142.24,10.16 145.41,13.34 155.57,13.34 158.12,10.79 163.83,10.79
GND3
  Bottom 0.508: IO7.2 20.32,59.69 19.68,59.05 19.68,53.34
  Bottom 1.016: OK4.2 33.02,54.61 | R56.1 13.97,80.01 16.51,77.47 16.51,75.56 13.97,73.03 13.97,61.91 13.02,60.96 IO8.1
  pour Bottom: 50.16,57.15 54.61,57.15 54.61,50.8 49.53,50.8 45.72,45.72 40.64,45.72 37.47,48.9 37.47,51.44 36.2,52.7 29.84,52.7 21.59,44.45 1.27,44.45 1.27,60.96 11.43,60.96 11.43,58.42 8.89,57.15 8.89,53.34 18.41,53.34 19.68,54.61 20.95,53.34 25.4,53.34 28.57,56.52 38.73,56.52 41.27,53.98 46.99,53.98
GND4
  Bottom 0.508: IO9.2 78.74,59.69 78.11,59.05 78.11,53.34
  Bottom 1.016: OK5.2 91.44,54.61 | R70.1 72.39,80.01 74.93,77.47 74.93,75.56 72.39,73.03 72.39,61.91 71.44,60.96 IO10.1
  pour Bottom: 108.58,57.15 113.03,57.15 113.03,50.8 107.95,50.8 104.14,45.72 99.06,45.72 95.89,48.9 95.89,51.44 94.61,52.7 88.27,52.7 80.01,44.45 59.69,44.45 59.69,60.96 69.85,60.96 69.85,58.42 67.31,57.15 67.31,53.34 76.83,53.34 78.11,54.61 79.38,53.34 83.82,53.34 87,56.52 97.16,56.52 99.69,53.98 105.41,53.98
GND5
  Bottom 0.508: IO11.2 137.16,59.69 136.53,59.05 136.53,53.34
  Bottom 1.016: OK6.2 149.86,54.61 | R84.1 130.81,80.01 133.35,77.47 133.35,75.56 130.81,73.03 130.81,61.91 129.86,60.96 IO12.1
  pour Bottom: 167,57.15 171.45,57.15 171.45,50.8 166.37,50.8 162.56,45.72 157.48,45.72 154.31,48.9 154.31,51.44 153.03,52.7 146.69,52.7 138.43,44.45 118.11,44.45 118.11,60.96 128.27,60.96 128.27,58.42 125.73,57.15 125.73,53.34 135.25,53.34 136.53,54.61 137.79,53.34 142.24,53.34 145.41,56.52 155.57,56.52 158.12,53.98 163.83,53.98
GND6
  Bottom 0.508: IO13.2 20.32,102.87 19.68,102.23 19.68,96.52
  Bottom 1.016: OK7.2 33.02,97.79 | R98.1 13.97,123.19 16.51,120.65 16.51,118.75 13.97,116.2 13.97,105.09 13.02,104.14 IO14.1
  pour Bottom: 50.16,100.33 54.61,100.33 54.61,93.98 49.53,93.98 45.72,88.9 40.64,88.9 37.47,92.08 37.47,94.61 36.2,95.89 29.84,95.89 21.59,87.63 1.27,87.63 1.27,104.14 11.43,104.14 11.43,101.6 8.89,100.33 8.89,96.52 18.41,96.52 19.68,97.79 20.95,96.52 25.4,96.52 28.57,99.69 38.73,99.69 41.27,97.16 46.99,97.16
GND7
  Bottom 0.508: IO15.2 78.74,102.87 78.11,102.23 78.11,96.52
  Bottom 1.016: OK8.2 91.44,97.79 | R112.1 72.39,123.19 74.93,120.65 74.93,118.75 72.39,116.2 72.39,105.09 71.44,104.14 IO16.1
  pour Bottom: 108.58,100.33 113.03,100.33 113.03,93.98 107.95,93.98 104.14,88.9 99.06,88.9 95.89,92.08 95.89,94.61 94.61,95.89 88.27,95.89 80.01,87.63 59.69,87.63 59.69,104.14 69.85,104.14 69.85,101.6 67.31,100.33 67.31,96.52 76.83,96.52 78.11,97.79 79.38,96.52 83.82,96.52 87,99.69 97.16,99.69 99.69,97.16 105.41,97.16
GND8
  Bottom 0.508: IO17.2 137.16,102.87 136.53,102.23 136.53,96.52
  Bottom 1.016: OK9.2 149.86,97.79 | R126.1 130.81,123.19 133.35,120.65 133.35,118.75 130.81,116.2 130.81,105.09 129.86,104.14 IO18.1
  pour Bottom: 167,100.33 171.45,100.33 171.45,93.98 166.37,93.98 162.56,88.9 157.48,88.9 154.31,92.08 154.31,94.61 153.03,95.89 146.69,95.89 138.43,87.63 118.11,87.63 118.11,104.14 128.27,104.14 128.27,101.6 125.73,100.33 125.73,96.52 135.25,96.52 136.53,97.79 137.79,96.52 142.24,96.52 145.41,99.69 155.57,99.69 158.12,97.16 163.83,97.16
GND9
  Bottom 0.508: IO19.2 20.32,146.05 19.68,145.41 19.68,139.7
  Bottom 1.016: OK10.2 33.02,140.97 | R140.1 13.97,166.37 16.51,163.83 16.51,161.93 13.97,159.38 13.97,148.27 13.02,147.32 IO20.1
  pour Bottom: 50.16,143.51 54.61,143.51 54.61,137.16 49.53,137.16 45.72,132.08 40.64,132.08 37.47,135.25 37.47,137.79 36.2,139.06 29.84,139.06 21.59,130.81 1.27,130.81 1.27,147.32 11.43,147.32 11.43,144.78 8.89,143.51 8.89,139.7 18.41,139.7 19.68,140.97 20.95,139.7 25.4,139.7 28.57,142.88 38.73,142.88 41.27,140.34 46.99,140.34
GND10
  Bottom 0.508: IO21.2 78.74,146.05 78.11,145.41 78.11,139.7
  Bottom 1.016: OK11.2 91.44,140.97 | R154.1 72.39,166.37 74.93,163.83 74.93,161.93 72.39,159.38 72.39,148.27 71.44,147.32 IO22.1
  pour Bottom: 108.58,143.51 113.03,143.51 113.03,137.16 107.95,137.16 104.14,132.08 99.06,132.08 95.89,135.25 95.89,137.79 94.61,139.06 88.27,139.06 80.01,130.81 59.69,130.81 59.69,147.32 69.85,147.32 69.85,144.78 67.31,143.51 67.31,139.7 76.83,139.7 78.11,140.97 79.38,139.7 83.82,139.7 87,142.88 97.16,142.88 99.69,140.34 105.41,140.34
GND11
  Bottom 0.508: IO23.2 137.16,146.05 136.53,145.41 136.53,139.7
  Bottom 1.016: OK12.2 149.86,140.97 | R168.1 130.81,166.37 133.35,163.83 133.35,161.93 130.81,159.38 130.81,148.27 129.86,147.32 IO24.1
  pour Bottom: 167,143.51 171.45,143.51 171.45,137.16 166.37,137.16 162.56,132.08 157.48,132.08 154.31,135.25 154.31,137.79 153.03,139.06 146.69,139.06 138.43,130.81 118.11,130.81 118.11,147.32 128.27,147.32 128.27,144.78 125.73,143.51 125.73,139.7 135.25,139.7 136.53,140.97 137.79,139.7 142.24,139.7 145.41,142.88 155.57,142.88 158.12,140.34 163.83,140.34
N$1
  Bottom 1.016: C1.1 16.51,26.67 R2.1
N$2
  Bottom 0.508: IO1.1 27.94,17.78 R10.1
  Bottom 1.016: R9.1 30.48,35.56 27.94,33.02 R1.2 R2.2 29.21,26.67 R10.1
N$3
  Bottom 1.016: R8.2 12.7,31.75 C4.+ | R7.2 C4.+ | IO2.2 10.16,20.32 5.08,25.4 C4.+
N$4
  Bottom 0.508: C1.2 20.32,22.86 19.38,21.92 IO1.4
  Bottom 1.016: R1.1 19.05,30.48 21.59,27.94 R7.1 C1.2
N$5
  Bottom 0.508: R3.2 13.34,12.7 18.41,17.78 IO1.3
N$6
  Bottom 1.016: R3.1 R6.2 R4.1 R5.1 26.67,13.97 C2.2
N$7
  pour Bottom: 46.99,21.59 48.58,20 54.61,20 54.61,15.24 49.53,15.24 46.35,12.06 41.91,12.06 41.27,12.7 41.27,20.32 40.01,21.59 40.01,26.04 45.72,26.04 46.99,24.77
N$8
  Bottom 1.016: OK1.1 38.1,15.24 R12.2 R10.2 34.29,19.05 31.75,21.59 R11.1
N$9
  pour Bottom: 54.61,26.99 50.48,26.99 46.35,31.11 40.01,31.11 39.37,31.75 39.37,36.83 40.01,37.47 45.09,37.47 50.8,31.75 54.61,31.75
N$10
  Bottom 1.016: P5.P$1 OK1.5
N$11
  Bottom 1.016: OK1.4 30.48,5.71 P6.P$1
N$12
  Bottom 1.016: LED1.K R14.2
N$13
  Bottom 0.508: IO3.1 86.36,17.78 R16.1
  Bottom 1.016: R27.1 88.9,35.56 86.36,33.02 R15.2 R20.2 87.63,26.67 R16.1
N$14
  Bottom 1.016: R13.2 C5.-
N$15
  Bottom 0.508: C6.2 78.74,22.86 77.8,21.92 IO3.4
  Bottom 1.016: R15.1 77.47,30.48 80.01,27.94 R25.1 C6.2
N$16
  Bottom 0.508: R21.2 71.75,12.7 76.83,17.78 IO3.3
N$17
  Bottom 1.016: R21.1 R24.2 R22.1 R23.1 85.09,13.97 C7.2
N$18
  Bottom 1.016: R26.2 71.12,31.75 C9.+ | R25.2 C9.+ | IO4.2 68.58,20.32 63.5,25.4 C9.+
N$19
  Bottom 1.016: OK2.1 96.52,15.24 R18.2 R16.2 92.71,19.05 90.17,21.59 R17.1
N$20
  pour Bottom: 113.03,26.99 108.9,26.99 104.78,31.11 98.42,31.11 97.79,31.75 97.79,36.83 98.42,37.47 103.5,37.47 109.22,31.75 113.03,31.75
N$21
  Bottom 1.016: P11.P$1 OK2.5
N$22
  Bottom 1.016: OK2.4 88.9,5.71 P12.P$1
N$23
  Bottom 1.016: R19.2 C10.-
N$24
  pour Bottom: 105.41,21.59 107,20 113.03,20 113.03,15.24 107.95,15.24 104.78,12.06 100.33,12.06 99.69,12.7 99.69,20.32 98.42,21.59 98.42,26.04 104.14,26.04 105.41,24.77
N$25
  Bottom 1.016: C6.1 74.93,26.67 R20.1
N$26
  Bottom 1.016: LED2.K R28.2
N$27
  Bottom 0.508: IO5.1 144.78,17.78 R30.1
  Bottom 1.016: R41.1 147.32,35.56 144.78,33.02 R29.2 R34.2 146.05,26.67 R30.1
N$28
  Bottom 0.508: C11.2 137.16,22.86 136.22,21.92 IO5.4
  Bottom 1.016: R29.1 135.89,30.48 138.43,27.94 R39.1 C11.2
N$29
  Bottom 0.508: R35.2 130.18,12.7 135.25,17.78 IO5.3
N$30
  Bottom 1.016: R35.1 R38.2 R36.1 R37.1 143.51,13.97 C12.2
N$31
  Bottom 1.016: R40.2 129.54,31.75 C14.+ | R39.2 C14.+ | IO6.2 127,20.32 121.92,25.4 C14.+
N$32
  Bottom 1.016: OK3.1 154.94,15.24 R32.2 R30.2 151.13,19.05 148.59,21.59 R31.1
N$33
  pour Bottom: 171.45,26.99 167.32,26.99 163.19,31.11 156.84,31.11 156.21,31.75 156.21,36.83 156.84,37.47 161.93,37.47 167.64,31.75 171.45,31.75
N$34
  Bottom 1.016: P17.P$1 OK3.5
N$35
  Bottom 1.016: OK3.4 147.32,5.71 P18.P$1
N$36
  Bottom 1.016: R33.2 C15.-
N$37
  pour Bottom: 163.83,21.59 165.42,20 171.45,20 171.45,15.24 166.37,15.24 163.19,12.06 158.75,12.06 158.12,12.7 158.12,20.32 156.84,21.59 156.84,26.04 162.56,26.04 163.83,24.77
N$38
  Bottom 1.016: C11.1 133.35,26.67 R34.1
N$39
  Bottom 1.016: LED3.K R42.2
N$40
  Bottom 0.508: IO7.1 27.94,60.96 R44.1
  Bottom 1.016: R55.1 30.48,78.74 27.94,76.2 R43.2 R48.2 29.21,69.85 R44.1
N$41
  Bottom 0.508: C16.2 20.32,66.04 19.38,65.1 IO7.4
  Bottom 1.016: R43.1 19.05,73.66 21.59,71.12 R53.1 C16.2
N$42
  Bottom 0.508: R49.2 13.34,55.88 18.41,60.96 IO7.3
N$43
  Bottom 1.016: R49.1 R52.2 R50.1 R51.1 26.67,57.15 C17.2
N$44
  Bottom 1.016: R54.2 12.7,74.93 C19.+ | R53.2 C19.+ | IO8.2 10.16,63.5 5.08,68.58 C19.+
N$45
  Bottom 1.016: OK4.1 38.1,58.42 R46.2 R44.2 34.29,62.23 31.75,64.77 R45.1
N$46
  pour Bottom: 54.61,70.17 50.48,70.17 46.35,74.3 40.01,74.3 39.37,74.93 39.37,80.01 40.01,80.64 45.09,80.64 50.8,74.93 54.61,74.93
N$47
  Bottom 1.016: P23.P$1 OK4.5
N$48
  Bottom 1.016: OK4.4 30.48,48.9 P24.P$1
N$49
  Bottom 1.016: R47.2 C20.-
N$50
  pour Bottom: 46.99,64.77 48.58,63.18 54.61,63.18 54.61,58.42 49.53,58.42 46.35,55.24 41.91,55.24 41.27,55.88 41.27,63.5 40.01,64.77 40.01,69.22 45.72,69.22 46.99,67.94
N$51
  Bottom 1.016: C16.1 16.51,69.85 R48.1
N$52
  Bottom 1.016: LED4.K R56.2
N$53
  Bottom 0.508: IO9.1 86.36,60.96 R58.1
  Bottom 1.016: R69.1 88.9,78.74 86.36,76.2 R57.2 R62.2 87.63,69.85 R58.1
N$54
  Bottom 0.508: C21.2 78.74,66.04 77.8,65.1 IO9.4
  Bottom 1.016: R57.1 77.47,73.66 80.01,71.12 R67.1 C21.2
N$55
  Bottom 0.508: R63.2 71.75,55.88 76.83,60.96 IO9.3
N$56
  Bottom 1.016: R63.1 R66.2 R64.1 R65.1 85.09,57.15 C22.2
N$57
  Bottom 1.016: R68.2 71.12,74.93 C24.+ | R67.2 C24.+ | IO10.2 68.58,63.5 63.5,68.58 C24.+
N$58
  Bottom 1.016: OK5.1 96.52,58.42 R60.2 R58.2 92.71,62.23 90.17,64.77 R59.1
N$59
  pour Bottom: 113.03,70.17 108.9,70.17 104.78,74.3 98.42,74.3 97.79,74.93 97.79,80.01 98.42,80.64 103.5,80.64 109.22,74.93 113.03,74.93
N$60
  Bottom 1.016: P29.P$1 OK5.5
N$61
  Bottom 1.016: OK5.4 88.9,48.9 P30.P$1
N$62
  Bottom 1.016: R61.2 C25.-
N$63
  pour Bottom: 105.41,64.77 107,63.18 113.03,63.18 113.03,58.42 107.95,58.42 104.78,55.24 100.33,55.24 99.69,55.88 99.69,63.5 98.42,64.77 98.42,69.22 104.14,69.22 105.41,67.94
N$64
  Bottom 1.016: C21.1 74.93,69.85 R62.1
N$65
  Bottom 1.016: LED5.K R70.2
N$66
  Bottom 0.508: IO11.1 144.78,60.96 R72.1
  Bottom 1.016: R83.1 147.32,78.74 144.78,76.2 R71.2 R76.2 146.05,69.85 R72.1
N$67
  Bottom 0.508: C26.2 137.16,66.04 136.22,65.1 IO11.4
  Bottom 1.016: R71.1 135.89,73.66 138.43,71.12 R81.1 C26.2
N$68
  Bottom 0.508: R77.2 130.18,55.88 135.25,60.96 IO11.3
N$69
  Bottom 1.016: R77.1 R80.2 R78.1 R79.1 143.51,57.15 C27.2
N$70
  Bottom 1.016: R82.2 129.54,74.93 C29.+ | R81.2 C29.+ | IO12.2 127,63.5 121.92,68.58 C29.+
N$71
  Bottom 1.016: OK6.1 154.94,58.42 R74.2 R72.2 151.13,62.23 148.59,64.77 R73.1
N$72
  pour Bottom: 171.45,70.17 167.32,70.17 163.19,74.3 156.84,74.3 156.21,74.93 156.21,80.01 156.84,80.64 161.93,80.64 167.64,74.93 171.45,74.93
N$73
  Bottom 1.016: P35.P$1 OK6.5
N$74
  Bottom 1.016: OK6.4 147.32,48.9 P36.P$1
N$75
  Bottom 1.016: R75.2 C30.-
N$76
  pour Bottom: 163.83,64.77 165.42,63.18 171.45,63.18 171.45,58.42 166.37,58.42 163.19,55.24 158.75,55.24 158.12,55.88 158.12,63.5 156.84,64.77 156.84,69.22 162.56,69.22 163.83,67.94
N$77
  Bottom 1.016: C26.1 133.35,69.85 R76.1
N$78
  Bottom 1.016: LED6.K R84.2
N$79
  Bottom 0.508: IO13.1 27.94,104.14 R86.1
  Bottom 1.016: R97.1 30.48,121.92 27.94,119.38 R85.2 R90.2 29.21,113.03 R86.1
N$80
  Bottom 0.508: C31.2 20.32,109.22 19.38,108.28 IO13.4
  Bottom 1.016: R85.1 19.05,116.84 21.59,114.3 R95.1 C31.2
N$81
  Bottom 0.508: R91.2 13.34,99.06 18.41,104.14 IO13.3
N$82
  Bottom 1.016: R91.1 R94.2 R92.1 R93.1 26.67,100.33 C32.2
N$83
  Bottom 1.016: R96.2 12.7,118.11 C34.+ | R95.2 C34.+ | IO14.2 10.16,106.68 5.08,111.76 C34.+
N$84
  Bottom 1.016: OK7.1 38.1,101.6 R88.2 R86.2 34.29,105.41 31.75,107.95 R87.1
N$85
  pour Bottom: 54.61,113.35 50.48,113.35 46.35,117.47 40.01,117.47 39.37,118.11 39.37,123.19 40.01,123.83 45.09,123.83 50.8,118.11 54.61,118.11
N$86
  Bottom 1.016: P41.P$1 OK7.5
N$87
  Bottom 1.016: OK7.4 30.48,92.08 P42.P$1
N$88
  Bottom 1.016: R89.2 C35.-
N$89
  pour Bottom: 46.99,107.95 48.58,106.36 54.61,106.36 54.61,101.6 49.53,101.6 46.35,98.42 41.91,98.42 41.27,99.06 41.27,106.68 40.01,107.95 40.01,112.39 45.72,112.39 46.99,111.12
N$90
  Bottom 1.016: C31.1 16.51,113.03 R90.1
N$91
  Bottom 1.016: LED7.K R98.2
N$92
  Bottom 0.508: IO15.1 86.36,104.14 R100.1
  Bottom 1.016: R111.1 88.9,121.92 86.36,119.38 R99.2 R104.2 87.63,113.03 R100.1
N$93
  Bottom 0.508: C36.2 78.74,109.22 77.8,108.28 IO15.4
  Bottom 1.016: R99.1 77.47,116.84 80.01,114.3 R109.1 C36.2
N$94
  Bottom 0.508: R105.2 71.75,99.06 76.83,104.14 IO15.3
N$95
  Bottom 1.016: R105.1 R108.2 R106.1 R107.1 85.09,100.33 C37.2
N$96
  Bottom 1.016: R110.2 71.12,118.11 C39.+ | R109.2 C39.+ | IO16.2 68.58,106.68 63.5,111.76 C39.+
N$97
  Bottom 1.016: OK8.1 96.52,101.6 R102.2 R100.2 92.71,105.41 90.17,107.95 R101.1
N$98
  pour Bottom: 113.03,113.35 108.9,113.35 104.78,117.47 98.42,117.47 97.79,118.11 97.79,123.19 98.42,123.83 103.5,123.83 109.22,118.11 113.03,118.11
N$99
  Bottom 1.016: P47.P$1 OK8.5
N$100
  Bottom 1.016: OK8.4 88.9,92.08 P48.P$1
N$101
  Bottom 1.016: R103.2 C40.-
N$102
  pour Bottom: 105.41,107.95 107,106.36 113.03,106.36 113.03,101.6 107.95,101.6 104.78,98.42 100.33,98.42 99.69,99.06 99.69,106.68 98.42,107.95 98.42,112.39 104.14,112.39 105.41,111.12
N$103
  Bottom 1.016: C36.1 74.93,113.03 R104.1
N$104
  Bottom 1.016: LED8.K R112.2
N$105
  Bottom 0.508: IO17.1 144.78,104.14 R114.1
  Bottom 1.016: R125.1 147.32,121.92 144.78,119.38 R113.2 R118.2 146.05,113.03 R114.1
N$106
  Bottom 0.508: C41.2 137.16,109.22 136.22,108.28 IO17.4
  Bottom 1.016: R113.1 135.89,116.84 138.43,114.3 R123.1 C41.2
N$107
  Bottom 0.508: R119.2 130.18,99.06 135.25,104.14 IO17.3
N$108
  Bottom 1.016: R119.1 R122.2 R120.1 R121.1 143.51,100.33 C42.2
N$109
  Bottom 1.016: R124.2 129.54,118.11 C44.+ | R123.2 C44.+ | IO18.2 127,106.68 121.92,111.76 C44.+
N$110
  Bottom 1.016: OK9.1 154.94,101.6 R116.2 R114.2 151.13,105.41 148.59,107.95 R115.1
N$111
  pour Bottom: 171.45,113.35 167.32,113.35 163.19,117.47 156.84,117.47 156.21,118.11 156.21,123.19 156.84,123.83 161.93,123.83 167.64,118.11 171.45,118.11
N$112
  Bottom 1.016: P53.P$1 OK9.5
N$113
  Bottom 1.016: OK9.4 147.32,92.08 P54.P$1
N$114
  Bottom 1.016: R117.2 C45.-
N$115
  pour Bottom: 163.83,107.95 165.42,106.36 171.45,106.36 171.45,101.6 166.37,101.6 163.19,98.42 158.75,98.42 158.12,99.06 158.12,106.68 156.84,107.95 156.84,112.39 162.56,112.39 163.83,111.12
N$116
  Bottom 1.016: C41.1 133.35,113.03 R118.1
N$117
  Bottom 1.016: LED9.K R126.2
N$118
  Bottom 0.508: IO19.1 27.94,147.32 R128.1
  Bottom 1.016: R139.1 30.48,165.1 27.94,162.56 R127.2 R132.2 29.21,156.21 R128.1
N$119
  Bottom 0.508: C46.2 20.32,152.4 19.38,151.46 IO19.4
  Bottom 1.016: R127.1 19.05,160.02 21.59,157.48 R137.1 C46.2
N$120
  Bottom 0.508: R133.2 13.34,142.24 18.41,147.32 IO19.3
N$121
  Bottom 1.016: R133.1 R136.2 R134.1 R135.1 26.67,143.51 C47.2
N$122
  Bottom 1.016: R138.2 12.7,161.29 C49.+ | R137.2 C49.+ | IO20.2 10.16,149.86 5.08,154.94 C49.+
N$123
  Bottom 1.016: OK10.1 38.1,144.78 R130.2 R128.2 34.29,148.59 31.75,151.13 R129.1
N$124
  pour Bottom: 54.61,156.53 50.48,156.53 46.35,160.66 40.01,160.66 39.37,161.29 39.37,166.37 40.01,167 45.09,167 50.8,161.29 54.61,161.29
N$125
  Bottom 1.016: P59.P$1 OK10.5
N$126
  Bottom 1.016: OK10.4 30.48,135.25 P60.P$1
N$127
  Bottom 1.016: R131.2 C50.-
N$128
  pour Bottom: 46.99,151.13 48.58,149.54 54.61,149.54 54.61,144.78 49.53,144.78 46.35,141.6 41.91,141.6 41.27,142.24 41.27,149.86 40.01,151.13 40.01,155.57 45.72,155.57 46.99,154.31
N$129
  Bottom 1.016: C46.1 16.51,156.21 R132.1
N$130
  Bottom 1.016: LED10.K R140.2
N$131
  Bottom 0.508: IO21.1 86.36,147.32 R142.1
  Bottom 1.016: R153.1 88.9,165.1 86.36,162.56 R141.2 R146.2 87.63,156.21 R142.1
N$132
  Bottom 0.508: C51.2 78.74,152.4 77.8,151.46 IO21.4
  Bottom 1.016: R141.1 77.47,160.02 80.01,157.48 R151.1 C51.2
N$133
  Bottom 0.508: R147.2 71.75,142.24 76.83,147.32 IO21.3
N$134
  Bottom 1.016: R147.1 R150.2 R148.1 R149.1 85.09,143.51 C52.2
N$135
  Bottom 1.016: R152.2 71.12,161.29 C54.+ | R151.2 C54.+ | IO22.2 68.58,149.86 63.5,154.94 C54.+
N$136
  Bottom 1.016: OK11.1 96.52,144.78 R144.2 R142.2 92.71,148.59 90.17,151.13 R143.1
N$137
  pour Bottom: 113.03,156.53 108.9,156.53 104.78,160.66 98.42,160.66 97.79,161.29 97.79,166.37 98.42,167 103.5,167 109.22,161.29 113.03,161.29
N$138
  Bottom 1.016: P65.P$1 OK11.5
N$139
  Bottom 1.016: OK11.4 88.9,135.25 P66.P$1
N$140
  Bottom 1.016: R145.2 C55.-
N$141
  pour Bottom: 105.41,151.13 107,149.54 113.03,149.54 113.03,144.78 107.95,144.78 104.78,141.6 100.33,141.6 99.69,142.24 99.69,149.86 98.42,151.13 98.42,155.57 104.14,155.57 105.41,154.31
N$142
  Bottom 1.016: C51.1 74.93,156.21 R146.1
N$143
  Bottom 1.016: LED11.K R154.2
N$144
  Bottom 0.508: IO23.1 144.78,147.32 R156.1
  Bottom 1.016: R167.1 147.32,165.1 144.78,162.56 R155.2 R160.2 146.05,156.21 R156.1
N$145
  Bottom 0.508: C56.2 137.16,152.4 136.22,151.46 IO23.4
  Bottom 1.016: R155.1 135.89,160.02 138.43,157.48 R165.1 C56.2
N$146
  Bottom 0.508: R161.2 130.18,142.24 135.25,147.32 IO23.3
N$147
  Bottom 1.016: R161.1 R164.2 R162.1 R163.1 143.51,143.51 C57.2
N$148
  Bottom 1.016: R166.2 129.54,161.29 C59.+ | R165.2 C59.+ | IO24.2 127,149.86 121.92,154.94 C59.+
N$149
  Bottom 1.016: OK12.1 154.94,144.78 R158.2 R156.2 151.13,148.59 148.59,151.13 R157.1
N$150
  pour Bottom: 171.45,156.53 167.32,156.53 163.19,160.66 156.84,160.66 156.21,161.29 156.21,166.37 156.84,167 161.93,167 167.64,161.29 171.45,161.29
N$151
  Bottom 1.016: P71.P$1 OK12.5
N$152
  Bottom 1.016: OK12.4 147.32,135.25 P72.P$1
N$153
  Bottom 1.016: R159.2 C60.-
N$154
  pour Bottom: 163.83,151.13 165.42,149.54 171.45,149.54 171.45,144.78 166.37,144.78 163.19,141.6 158.75,141.6 158.12,142.24 158.12,149.86 156.84,151.13 156.84,155.57 162.56,155.57 163.83,154.31
N$155
  Bottom 1.016: C56.1 133.35,156.21 R160.1
N$156
  Bottom 1.016: LED12.K R168.2
VCC
  Bottom 0.508: IO1.5 22.86,20.32 24.13,21.59 R4.2
  Bottom 1.016: R5.2 R4.2 R8.1 LED1.A 25.4,38.1 29.21,38.1 33.02,38.1 34.29,36.83 C5.+
  pour Bottom (rank 2): 32.38,26.67 32.38,31.11 34.29,33.02 36.2,31.11 45.09,31.11 50.48,25.72 54.61,25.72 54.61,21.27 48.58,21.27 47.62,22.23 47.62,25.4 46.35,26.67
VCC1
  Bottom 0.508: IO3.5 81.28,20.32 82.55,21.59 R22.2
  Bottom 1.016: R23.2 R22.2 R26.1 LED2.A 83.82,38.1 87.63,38.1 91.44,38.1 92.71,36.83 C10.+
  pour Bottom (rank 2): 90.81,26.67 90.81,31.11 92.71,33.02 94.61,31.11 103.5,31.11 108.9,25.72 113.03,25.72 113.03,21.27 107,21.27 106.05,22.23 106.05,25.4 104.78,26.67
VCC2
  Bottom 0.508: IO5.5 139.7,20.32 140.97,21.59 R36.2
  Bottom 1.016: R37.2 R36.2 R40.1 LED3.A 142.24,38.1 146.05,38.1 149.86,38.1 151.13,36.83 C15.+
  pour Bottom (rank 2): 149.22,26.67 149.22,31.11 151.13,33.02 153.03,31.11 161.93,31.11 167.32,25.72 171.45,25.72 171.45,21.27 165.42,21.27 164.47,22.23 164.47,25.4 163.19,26.67
VCC3
  Bottom 0.508: IO7.5 22.86,63.5 24.13,64.77 R50.2
  Bottom 1.016: R51.2 R50.2 R54.1 LED4.A 25.4,81.28 29.21,81.28 33.02,81.28 34.29,80.01 C20.+
  pour Bottom (rank 2): 32.38,69.85 32.38,74.3 34.29,76.2 36.2,74.3 45.09,74.3 50.48,68.9 54.61,68.9 54.61,64.45 48.58,64.45 47.62,65.41 47.62,68.58 46.35,69.85
VCC4
  Bottom 0.508: IO9.5 81.28,63.5 82.55,64.77 R64.2
  Bottom 1.016: R65.2 R64.2 R68.1 LED5.A 83.82,81.28 87.63,81.28 91.44,81.28 92.71,80.01 C25.+
  pour Bottom (rank 2): 90.81,69.85 90.81,74.3 92.71,76.2 94.61,74.3 103.5,74.3 108.9,68.9 113.03,68.9 113.03,64.45 107,64.45 106.05,65.41 106.05,68.58 104.78,69.85
VCC5
  Bottom 0.508: IO11.5 139.7,63.5 140.97,64.77 R78.2
  Bottom 1.016: R79.2 R78.2 R82.1 LED6.A 142.24,81.28 146.05,81.28 149.86,81.28 151.13,80.01 C30.+
  pour Bottom (rank 2): 149.22,69.85 149.22,74.3 151.13,76.2 153.03,74.3 161.93,74.3 167.32,68.9 171.45,68.9 171.45,64.45 165.42,64.45 164.47,65.41 164.47,68.58 163.19,69.85
VCC6
  Bottom 0.508: IO13.5 22.86,106.68 24.13,107.95 R92.2
  Bottom 1.016: R93.2 R92.2 R96.1 LED7.A 25.4,124.46 29.21,124.46 33.02,124.46 34.29,123.19 C35.+
  pour Bottom (rank 2): 32.38,113.03 32.38,117.47 34.29,119.38 36.2,117.47 45.09,117.47 50.48,112.08 54.61,112.08 54.61,107.63 48.58,107.63 47.62,108.58 47.62,111.76 46.35,113.03
VCC7
  Bottom 0.508: IO15.5 81.28,106.68 82.55,107.95 R106.2
  Bottom 1.016: R107.2 R106.2 R110.1 LED8.A 83.82,124.46 87.63,124.46 91.44,124.46 92.71,123.19 C40.+
  pour Bottom (rank 2): 90.81,113.03 90.81,117.47 92.71,119.38 94.61,117.47 103.5,117.47 108.9,112.08 113.03,112.08 113.03,107.63 107,107.63 106.05,108.58 106.05,111.76 104.78,113.03
VCC8
  Bottom 0.508: IO17.5 139.7,106.68 140.97,107.95 R120.2
  Bottom 1.016: R121.2 R120.2 R124.1 LED9.A 142.24,124.46 146.05,124.46 149.86,124.46 151.13,123.19 C45.+
  pour Bottom (rank 2): 149.22,113.03 149.22,117.47 151.13,119.38 153.03,117.47 161.93,117.47 167.32,112.08 171.45,112.08 171.45,107.63 165.42,107.63 164.47,108.58 164.47,111.76 163.19,113.03
VCC9
  Bottom 0.508: IO19.5 22.86,149.86 24.13,151.13 R134.2
  Bottom 1.016: R135.2 R134.2 R138.1 LED10.A 25.4,167.64 29.21,167.64 33.02,167.64 34.29,166.37 C50.+
  pour Bottom (rank 2): 32.38,156.21 32.38,160.66 34.29,162.56 36.2,160.66 45.09,160.66 50.48,155.26 54.61,155.26 54.61,150.81 48.58,150.81 47.62,151.76 47.62,154.94 46.35,156.21
VCC10
  Bottom 0.508: IO21.5 81.28,149.86 82.55,151.13 R148.2
  Bottom 1.016: R149.2 R148.2 R152.1 LED11.A 83.82,167.64 87.63,167.64 91.44,167.64 92.71,166.37 C55.+
  pour Bottom (rank 2): 90.81,156.21 90.81,160.66 92.71,162.56 94.61,160.66 103.5,160.66 108.9,155.26 113.03,155.26 113.03,150.81 107,150.81 106.05,151.76 106.05,154.94 104.78,156.21
VCC11
  Bottom 0.508: IO23.5 139.7,149.86 140.97,151.13 R162.2
  Bottom 1.016: R163.2 R162.2 R166.1 LED12.A 142.24,167.64 146.05,167.64 149.86,167.64 151.13,166.37 C60.+
  pour Bottom (rank 2): 149.22,156.21 149.22,160.66 151.13,162.56 153.03,160.66 161.93,160.66 167.32,155.26 171.45,155.26 171.45,150.81 165.42,150.81 164.47,151.76 164.47,154.94 163.19,156.21